# Altium PCB PCB2.PcbDoc
Units mm, origin at the board's own origin, x right, y up, seen from the top; angles counter-clockwise.
Board outline 50 x 43.3 mm, 2 copper layers (Top Layer, Bottom Layer); 45 components, 34 nets, 189 pads, 120 vias.
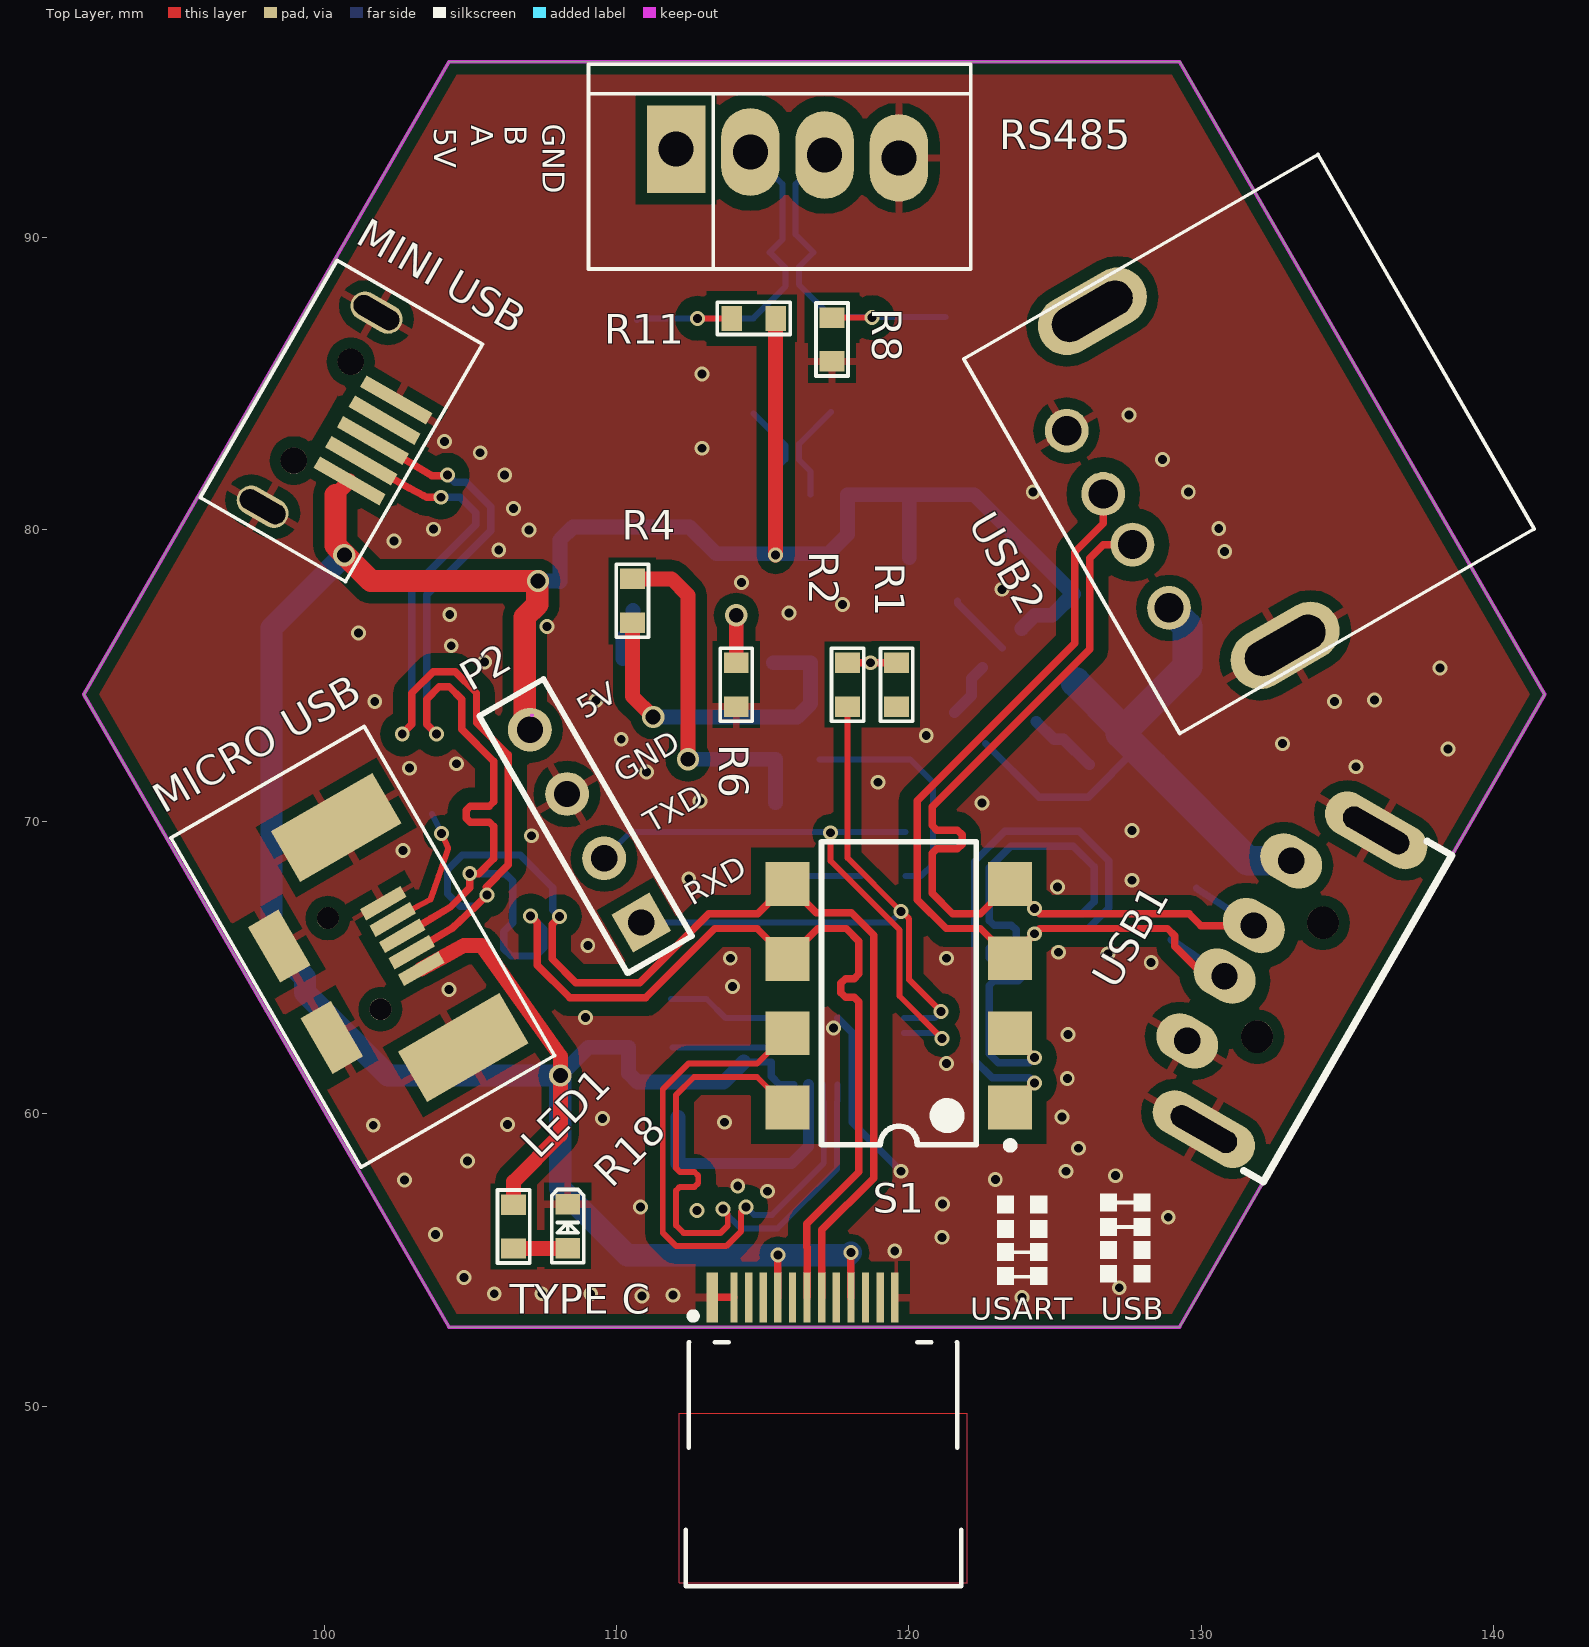
[diagram p0: Top Layer view]
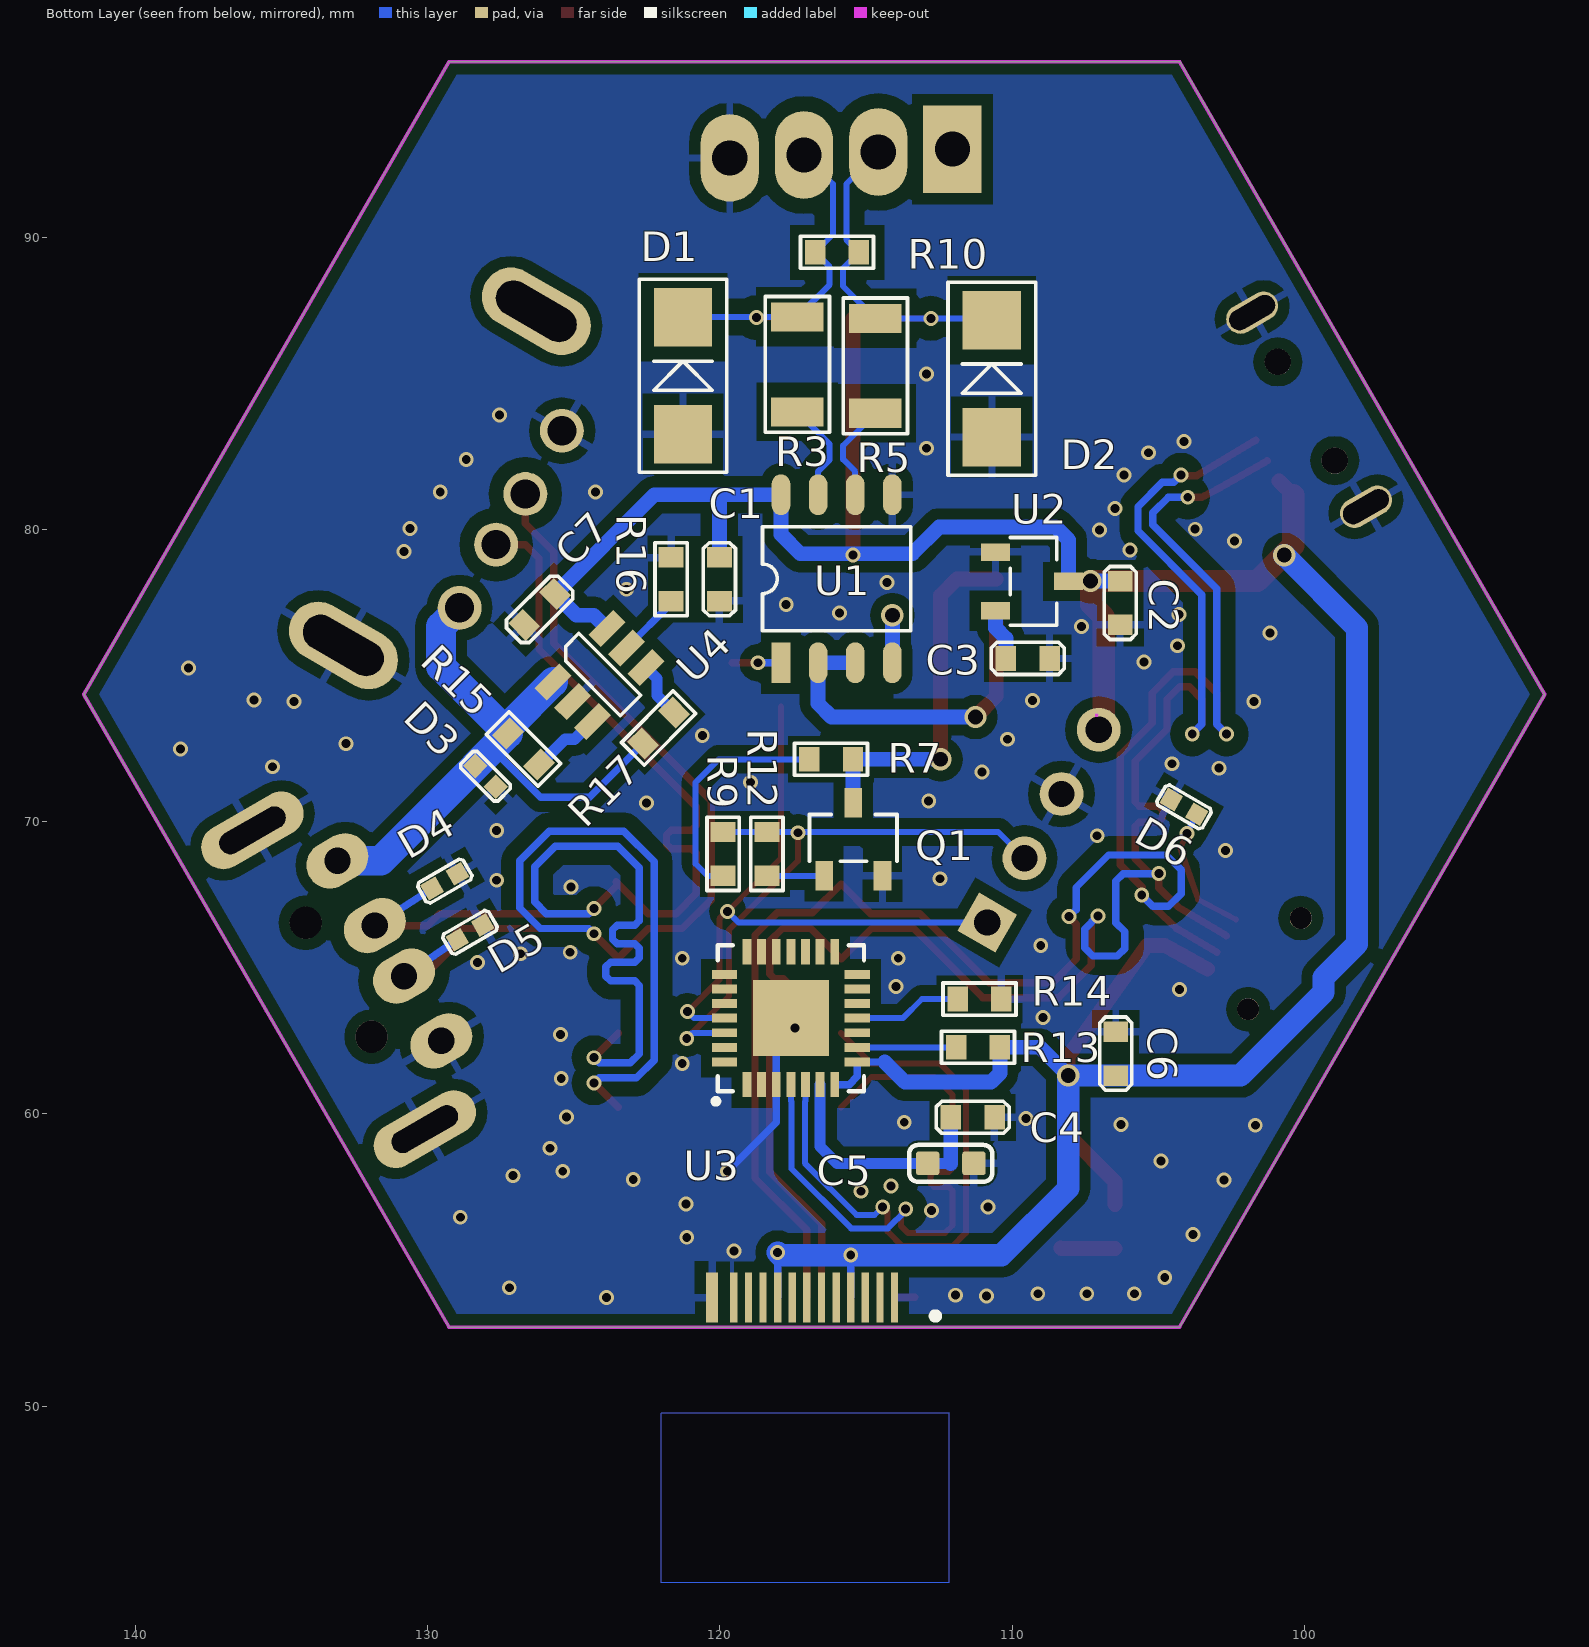
[diagram p1: Bottom Layer view, seen from below]

## Layer stack, top to bottom
Top Layer: signal copper 0.0356
Dielectric: dielectric 0.32, FR-4, Dk 4.8
Bottom Layer: signal copper 0.0356

## Board outline
104.267,52.705 91.767,74.356 104.267,96.006 129.267,96.006 141.767,74.356 129.267,52.705

## Design rules (kind name [scope] priority, off if disabled: settings)
Clearance usb [InNetClass('usb')] p1: gap=0.127
Clearance gnd [InPolygon] p2: gap=0.381
Clearance [All] p3: gap=0.127
DiffPairsRouting [All] p1: maxlimit=0.254 minlimit=0.152 mostfreqgap=0.254 maxuncoupledlength=12.7
PolygonConnect [IsVia] p1: connectstyle=Direct reliefconductorwidth=0.254 reliefentries=4 polygonreliefangle="90 Angle"
PolygonConnect PolygonConnect_1 [All] p2: connectstyle=Relief reliefconductorwidth=0.254 reliefentries=4 polygonreliefangle="90 Angle"
RoutingVias RoutingVias_1 [All] p1: holewidth=0.711 width=1.27 viastyle="Through Hole" minholewidth=0.711 minwidth=1.27 maxholewidth=0.711 maxwidth=1.27
RoutingVias [All] p2: holewidth=0.711 width=1.27 viastyle="Through Hole" minholewidth=0.711 minwidth=1.27 maxholewidth=0.711 maxwidth=1.27
SilkscreenOverComponentPads [All] p1: minsilkscreentomaskgap=0.025
SolderMaskExpansion [All] p1: expansion=0.102
Width [All] p1: maxlimit=5.08 minlimit=0.127 preferedwidth=0.254
26 further rules are at their usual default settings.

## Classes and differential pairs
component class connector: C4 C5 C6 C7 C61 D3 D4 D5 D6 D7 J1 LED1 "MICRO USB" "MINI USB" P2 P3 R13 R14 R15 R16 R17 R18 R19 R42 S1 "TYPE C" U3 U4 U7 USB1 USB2 USB3 USB4
component class 485: C1 C2 C3 D1 D2 D8 P1 Q1 Q19 R1 R2 R3 R4 R5 R6 R7 R8 R9 R10 R11 R12 R41 R43 R58 R83 R139 R218 RS485 U1 U2
net class usb: 485_N 485_P 4852_N 4852_P D2_N D2_P D3_N D3_P D_N D_P
differential pair D3: +D3_P -D3_N
differential pair D2: +D2_P -D2_N
differential pair D: +D_P -D_N
differential pair 4852: +4852_P -4852_N
differential pair 485: +485_P -485_N

## Components (designator, comment, footprint, x,y, rotation, side; value= is the part's Value field where it differs from the comment)
C1 "0.01uF" 0603C 120.015,77.546 r90 bottom
C2 "10uF/25V" 0603C 106.299,76.733 r90 bottom
C3 "10uF/25V" 0603C 108.712,75.59 r0 bottom
C4 "4.7uF/25V" 0603C 110.598,59.884 r0 bottom
C5 "0.1uF/50V" C0603 112.096,58.31 r180 bottom
C6 "10uF" 0603C 106.451,62.814 r270 bottom
C7 "47uF" 0603C 126.695,76.733 r135 bottom
D1 "SMAJ6.5CA" SMA 121.26,83.261 r90 bottom
D2 "SMAJ6.5CA" SMA 110.693,83.16 r90 bottom
D3 "PESDNC2FD5VB" C0402 128.372,71.907 r225 bottom
D4 "PESDNC2FD5VB" C0402 129.845,67.716 r150 bottom
D5 "PESDNC2FD5VB" C0402 128.981,65.964 r150 bottom
D6 "PESDNC2FD5VB" C0402 103.683,70.256 r30 bottom
LED1 "" 0603LED 108.331,55.411 r90 top
"MICRO USB" "Micro-USB" "MICRO USB M" 102.667,66.091 r30 top (schematic designator USB3)
"MINI USB" "USB-MINI-A" MINIUSB-M 100.863,81.661 r330 top (schematic designator USB4)
P2 "Header 4" HDR1X4 110.846,66.548 r120 top
Q1 "MMBT3904" SOT23-3 116.434,68.148 r270 bottom
R1 "100k" 0603R 119.583,75.438 r270 top
R2 "1K" 0603R 117.907,75.438 r270 top
R3 "10" 1206R 117.348,87.274 r270 bottom
R4 "1K" 0603R 110.541,76.81 r90 top
R5 "10" 1206R 114.681,87.224 r270 bottom
R6 "1K" 0603R 114.097,75.438 r270 top
R7 "10K" 0603R 115.443,72.136 r0 bottom
R8 "1k" 0603R 117.373,87.249 r270 top
R9 "10K" 0603R 119.888,68.148 r90 bottom
R10 "100" 0603R 115.24,89.484 r0 bottom
R11 "1k" 0603R 115.443,87.224 r180 top
R12 "4.7K" 0603R 118.389,68.148 r90 bottom
R13 "1K/5%/1/8W" 0603R 110.414,62.281 r0 bottom
R14 "10K/5%/1/8W" 0603R 110.363,63.932 r0 bottom
R15 "10K/5%/1/8W" 0603R 126.187,71.958 r45 bottom
R16 "20K/1%/1/8W" 0603R 121.666,77.546 r90 bottom
R17 "10K/5%/1/8W" 0603R 121.564,73.736 r315 bottom
R18 "330" 0603R 106.477,56.896 r270 top
RS485 "Header 4" 4X2.54MMZ 112.039,93.015 r0 top (schematic designator P1)
S1 "SW DIP-4" SW_SMT_8 119.659,61.493 r180 top
"TYPE C" "TYPE C" Type_C-M 114.021,53.721 r0 top (schematic designator J1)
U1 "THVD1500" so-8 117.907,75.438 r90 bottom
U2 "XC6206P302MR" SOT23-3 110.566,79.223 r0 bottom
U3 "CP2102" QFN28N5X5-0p5P-L 117.568,63.277 r90 bottom
U4 "JW7115-2" SOT23-6 125.705,74.778 r225 bottom
USB1 "USB-A-M" USB_A/P_A 133.045,64.592 r60 top
USB2 "USB-A-F" USB-A 128.905,77.318 r120 top

## Footprints (in the part's own frame and the unit in brackets; to place one, negate y for a bottom-side part, rotate by r counter-clockwise, add the part's x,y. Pads: shape width x height; smd on the part's side, far side on the other; paste and mask are expansions set on the pad)
4X2.54MMZ [mm]
  rect 2x3 hole 1.2: 1(0,0)
  oval 2x3 hole 1.2: 2(2.54,-0.1) 3(5.08,-0.2) 4(7.62,-0.3)
  silkscreen extent -3,-4.1 10.08,2.9
0603C [mm]
  rect 0.7x0.85 smd: 1(0,0) 2(1.5,0)
  silkscreen extent -0.5,-0.55 2,0.55
0603LED [mm]
  rect 0.7x0.85 smd: 1(0,0) 2(1.5,0)
  silkscreen extent -0.5,-0.55 2,0.55
0603R [mm]
  rect 0.7x0.85 smd: 1(0,0) 2(1.5,0)
  silkscreen extent -0.5,-0.55 2,0.55
1206R [mm]
  rect 1x1.8 smd: 1(0,0) 2(3.25,0)
  silkscreen extent -0.7,-1.1 3.95,1.1
C0402 [mm]
  rect 0.6x0.6 smd: 1(0,0) 2(1,0)
  silkscreen extent -0.4,-0.4 1.4,0.4
C0603 [mm]
  rrect20% 0.8x0.8 smd: 1(-0.792,0) 2(0.792,0)
  silkscreen extent -1.42,-0.63 1.42,0.63, body extent -0.8,-0.4 0.8,0.4, height 0.3
HDR1X4 [mm] "Connector; Header; 4 Position"
  rect 1.5x1.5 hole 0.9: 1(0,0)
  round 1.5 hole 0.9: 2(2.54,0) 3(5.08,0) 4(7.62,0)
  silkscreen extent -1.27,-1.27 8.89,1.27
"MICRO USB M" [mm]
  rect 1.6x0.45 smd: 1(0,-1.3) 2(0,-0.65) 3(0,0) 4(0,0.65) 5(0,1.3)
  rect 1.2x2.2 smd: 6(-3.82,1.8) 7(-3.82,-1.8)
  rect 4x2 smd: 8(-0.1,4.35) 9(-0.1,-4.35)
  round 0.75 hole 0.75 unplated: 11(-1.9,-1.8) 12(-1.9,1.8)
  silkscreen extent -5.18,-6.15 2.46,6.86
MINIUSB-M [mm]
  rect 2.6x0.45 smd: 1(0,0) 2(0,0.8) 3(0,1.6) 4(0,2.4) 5(0,3.2)
  oval 1.9x1 hole 0.7 slot 1.7 at 0 deg: 6(-2.134,-2.25) 7(-2.083,5.45)
  round 0.9 hole 0.9 unplated: 8(-2,3.55) 9(-2,-0.35)
  silkscreen extent -4.14,-3.05 1.6,6.32
QFN28N5X5-0p5P-L [mil]
  rect 34x12 smd mask+5: 1(-89.5,59.05) 2(-89.5,39.37) 3(-89.5,19.69) 4(-89.5,0) 5(-89.5,-19.68) 6(-89.5,-39.37) 7(-89.5,-59.05) 15(89.5,-59.05) 16(89.5,-39.37) 17(89.5,-19.68) 18(89.5,0) 19(89.5,19.68) 20(89.5,39.37) 21(89.5,59.05)
  rect 12x34 smd mask+5: 8(-59.05,-89.5) 9(-39.37,-89.5) 10(-19.68,-89.5) 11(0,-89.5) 12(19.68,-89.5) 13(39.37,-89.5) 14(59.05,-89.5) 22(59.05,89.5) 23(39.37,89.5) 24(19.68,89.5) 25(0,89.5) 26(-19.68,89.5) 27(-39.37,89.5) 28(-59.05,89.5)
  rect 102.36x102.36 smd mask+5: 29(0,0)
  silkscreen extent -114,-99 99,103
SMA [mm]
  rect 2x2 smd: 1(0,0) 2(4,0)
  silkscreen extent -1.3,-1.5 5.3,1.5
so-8 [mil]
  rect 55x25 smd: 1(0,0)
  oval 55x25 smd: 2(0,-50) 3(0,-100) 4(0,-150) 5(226.38,-150) 6(226.38,-100) 7(226.38,-50) 8(226.38,0)
  silkscreen extent 43,-175 183,25
SOT23-3 [mm]
  rect 1x0.6 smd: 1(0,0) 2(0,2) 3(-2.5,1)
  silkscreen extent -2.1,-0.5 -0.5,2.5
SOT23-6 [mm]
  rect 0.6x1.2 smd: 1(0,0) 2(0.95,0) 3(1.9,0) 4(1.9,2.6) 5(0.95,2.6) 6(0,2.6)
  silkscreen extent -0.56,0.81 2.44,1.8
SW_SMT_8 [mm] "DIP; 4 Leads; Row Spacing 7.62 mm; Pitch 2.54 mm"
  rect 1.5x1.5 smd: 1(-3.81,1.27) 2(-3.81,-1.27) 3(-3.81,-3.835) 4(-3.81,-6.375) 5(3.81,-6.375) 6(3.81,-3.81) 7(3.81,-1.27) 8(3.81,1.27)
  silkscreen extent -3.94,-7.82 2.65,2.69
Type_C-M [mm]
  rect 0.25x1.7 smd paste+0 mask+0: A1(0,0) A2(0.5,0) A3(1,0) A4(1.5,0) A5(2,0) A6(2.5,0) A7(3,0) A8(3.5,0) A9(4,0) A10(4.5,0) A11(5,0) A12(5.5,0)
  rect 0.4x1.7 smd paste+0 mask+0: A13(-0.75,0)
  rect 0.25x1.7 smd far side paste+0 mask+0: B1(5.5,0) B2(5,0) B3(4.5,0) B4(4,0) B5(3.5,0) B6(3,0) B7(2.5,0) B8(2,0) B9(1.5,0) B10(1,0) B11(0.5,0) B12(0,0)
  rect 0.4x1.7 smd far side paste+0 mask+0: B13(6.25,0)
  Multi-Layer lines w0.025: -1.88,-9.757 7.976,-9.757 7.976,-3.966 -1.88,-3.966 -1.88,-9.757
  silkscreen extent -1.65,-9.88 7.77,-0.53
USB-A [mm]
  round 1.5 hole 1: 1(0,0) 2(2.5,0) 3(4.5,0) 4(7,0)
  oval 2x4 hole 1.2 slot 3 at 90 deg: 5(-3.1,-2.8) 6(10.1,-2.8)
  silkscreen extent -3.91,-12.17 10.89,1.83
USB_A/P_A [mm] "A型USB 插头，20*"
  round 1.1 hole 1.1 unplated: 0(-2.25,0) 0(2.25,0)
  oval 1.6x2.2 hole 0.9: 1(3.543,2) 2(0.987,2) 3(-1.013,2) 4(-3.569,2)
  oval 1.524x3.81 hole 0.762 slot 2.5 at 90 deg: 5(-5.9,0) 5(5.9,0)
  silkscreen extent -6.45,-2.67 6.45,-1.7, body extent -14.3,-23.1 14.54,6.61, height 3.25

## Part data
C1 C2 C3: library part C, "C"
C4 C5: library part Cap, "Capacitor"
C6 C7: library part CAP, "Capacitor"
D1 D2: library part "DIODE S", "Schottky Diode"
D3 D4 D5 D6: library part 1_1.5KE100A_Dup1
LED1: library part LED
"MICRO USB" "MINI USB": library part USB
P2 RS485: "Header, 4-Pin"
Q1: library part NPN
R1 R3 R5 R8 R11: library part RES2
R2 R4 R6 R10 R18: library part R, "R"
R7 R9 R12: library part RES1
R13 R14 R15 R16 R17: library part Res2, "Resistor"
S1: "DIP Switch, 4 Position, SPST"
U1: library part SN65HVD06D
U3: "Imported"
USB1 USB2: library part "Header 5", "Header, 5-Pin"

## Via types
v1: diameter 0.508, hole 0.305, Top Layer to Bottom Layer, tented both sides, 114 vias
v2: diameter 0.762, hole 0.508, Top Layer to Bottom Layer, tented both sides, 6 vias

## Nets (pads, with @x,y where several pads share a name; then routed paths per layer and width w, separated by ;. In a path a pad name is that pad's centre, name@x,y a point inside that pad or via, vN(x,y) a via of type N, cw(c..) or ccw(c..) an arc to the next point about the centre after c; other vN are vias at no path point)
485_3.3V1: R1.2
485_EN1: Q1.3 R4.2 R7.1 | length 12.2
  Top Layer w0.508: R4.2 111.886,78.31 112.446,77.749 v2(112.446,72.136)
  Bottom Layer w0.508: v2(112.446,72.136) R7.1 115.443,70.658 Q1.3
485_N: D1.2 R3.1 R8.1 R10.2 RS485.3 | length 12.2
  Top Layer w0.203: R8.1 v1(118.745,87.249)
  Bottom Layer w0.203: RS485.3 116.129,91.824 116.129,90.095 R10.2 116.243,88.987 116.243,88.379 R3.1 121.246,87.274 D1.2
485_P: D2.2 R5.1 R10.1 R11.2 RS485.2 | length 12.2
  Top Layer w0.203: v1(112.776,87.224) R11.2 R11.2@113.918,87.249
  Bottom Layer w0.203: D2.2 110.757,87.224 R5.1 115.786,88.328 115.786,88.938 R10.1 115.672,89.916 115.672,91.823 RS485.2
4852_N: R5.2 U1.6 | length 3.4
  Bottom Layer w0.203: R5.2 115.786,82.869 115.786,82.398 115.773,82.398 115.367,81.991 U1.6
4852_P: R3.2 U1.7 | length 3.5
  Bottom Layer w0.203: U1.7 116.637,81.991 116.243,82.385 116.243,82.398 116.243,82.919 R3.2
+5V: D3.1 R15.2 R17.2 U4.1 USB1.1 USB2.1 | length 23.7
  Bottom Layer w0.254: R17.2 124.46,70.841 126.137,70.841 127.788,72.491
  Bottom Layer w1.016: U4.1 127.248,73.234 R15.2 ; D3.1 127.788,72.491 127.26,73.019 R15.2 ; USB2.1 129.54,76.683 129.54,75.311 R15.2 ; USB1.1 131.606,68.66 128.365,71.901 127.782,72.485 R15.2
AGND: "MICRO USB.5" "MICRO USB.6" "MICRO USB.7" "MICRO USB.8" "MICRO USB.9" "MINI USB.5" "MINI USB.6" "MINI USB.7" "TYPE C.A1" "TYPE C.A12" "TYPE C.A13" "TYPE C.B1" "TYPE C.B12" "TYPE C.B13" C1.1 C2.1 C3.1 C4.1 C5.2 C6.1 C7.1 D1.1 D2.1 D3.2 D4.2 D5.2 D6.2 LED1.2 P2.3 Q1.2 R6.2 R8.2 R14.1 R16.2 RS485.4 U1.5 U2.1 U3.3 U3.29 U4.2 USB1.4 USB1.5 USB2.4 USB2.5 | length 6.8
  Top Layer w0.254: 113.335,53.721 114.021,53.721
  Bottom Layer w0.254: U3.29 118.068,62.777 118.068,61.443 U3.3 118.068,59.706 v1(119.736,58.039)
  other v1: 123.876,53.721 110.871,53.772 111.938,53.797 105.816,53.848 107.442,53.848 109.118,53.848 127.203,54.051 104.775,54.407 119.521,55.309 121.133,55.778 103.81,55.88 128.88,56.464 112.751,56.693 110.82,56.82 121.158,56.921 115.164,57.353 114.148,57.531 102.743,57.734 122.961,57.76 127.076,57.887 125.374,58.039 104.902,58.395 125.806,58.826 101.676,59.614 106.274,59.639 113.69,59.715 109.525,59.842 125.247,59.893 125.425,61.214 121.285,61.722 125.451,62.713 117.424,62.941 108.941,63.297 104.267,64.262 113.97,64.364 128.295,65.176 113.894,65.329 121.285,65.329 126.822,65.481 125.12,65.532 109.017,65.761 125.095,67.767 127.635,67.996 112.471,68.047 102.692,69.012 107.086,69.52 127.635,69.698 122.504,70.637 112.852,70.714 118.948,71.349 111.023,71.704 102.921,71.831 135.306,71.882 104.521,71.984 138.455,72.492 132.791,72.669 110.16,72.822 120.599,72.949 101.727,74.117 134.569,74.117 109.296,74.143 135.941,74.168 138.176,75.26 105.486,75.463 104.343,76.022 101.168,76.454 107.62,76.683 104.292,77.089 115.9,77.14 117.729,77.428 123.19,77.953 114.275,78.181 130.81,79.248 105.969,79.299 102.387,79.604 107.01,79.985 103.734,80.01 130.607,80.035 106.477,80.721 124.257,81.28 129.565,81.28 106.172,81.864 128.676,82.398 105.334,82.626 112.928,82.779 104.115,83.007 127.533,83.922 112.928,85.319
CP_RXD: P2.1 R2.2 U3.25 | length 22.2
  Top Layer w0.203: R2.2 117.907,68.758 v1(119.736,66.929) ; v1@119.736,66.954 120.015,66.675 120.015,64.592 v1(121.107,63.5)
  Bottom Layer w0.203: P2.1 119.355,66.548 v1(119.736,66.929) ; U3.25 120.884,63.277 v1(121.107,63.5)
CP_TXD: P2.2 R9.2 R12.2 U3.26 | length 20.7
  Top Layer w0.203: v1(117.323,69.621) 117.323,68.66 119.685,66.297 119.685,64.033 v1(121.133,62.586)
  Bottom Layer w0.203: P2.2 110.476,69.648 R12.2 R9.2 ; U3.26 120.941,62.777 v1(121.133,62.586)
D2_N: S1.8 U3.4 | length 20.7
  Top Layer w0.203: v1(113.64,56.744) 113.805,56.578 113.805,56.261 113.805,56.172 113.563,55.931 112.293,55.931 112.039,56.185 112.039,57.379 112.166,57.506 112.669,57.506 112.796,57.633 112.796,57.887 112.669,58.014 112.166,58.014 112.039,58.141 112.039,59.944 112.039,60.655 112.649,61.265 114.808,61.265 S1.8
  Bottom Layer w0.203: v1(113.64,56.744) 113.64,56.693 114.249,56.083 115.505,56.083 117.547,58.125 117.547,60.431 117.568,60.452 U3.4
D2_P: S1.7 U3.5 | length 20.8
  Top Layer w0.203: 111.582,60.198 111.582,59.893 ; 111.665,60.928 111.874,61.136 ; v1(114.427,56.82) 114.262,56.655 114.262,55.983 113.753,55.474 112.039,55.474 111.582,55.931 111.582,59.893 ; S1.7 114.808,61.722 112.46,61.722 111.874,61.136 ; 111.582,59.893 111.582,60.845 111.874,61.136
  Bottom Layer w0.203: v1(114.427,56.82) 114.706,56.54 115.316,56.54 117.09,58.314 117.09,60.431 117.068,60.452 U3.5
D3_N: D4.1 S1.2 S1.4 USB1.2 USB2.2 | length 52.1
  Top Layer w0.254: S1.2 v1(124.308,61.925) ; S1.4@123.546,67.945 S1.4 ; USB2.2 126.65,79.483 126.187,79.019 126.187,75.895 120.802,70.51 120.802,69.869 120.961,69.71 121.667,69.71 121.825,69.552 121.825,69.234 121.667,69.075 120.961,69.075 120.802,68.917 120.802,67.546 121.495,66.853 122.453,66.853 S1.4 ; USB1.2 129.997,66.447 129.591,66.853 124.485,66.853 v1(124.308,67.031) S1.4
  Bottom Layer w0.254: v1(124.308,61.925) 124.13,61.747 123.063,61.747 122.758,62.052 122.758,64.395 122.917,64.554 123.741,64.554 123.9,64.713 123.9,65.03 123.741,65.189 122.917,65.189 122.758,65.348 122.758,65.665 122.917,65.824 123.513,65.824 123.672,65.983 123.672,66.3 123.513,66.459 122.917,66.459 122.758,66.618 122.758,68.428 123.495,69.164 125.628,69.164 126.34,68.453 126.34,67.259 125.933,66.853 124.485,66.853 v1(124.308,67.031) ; D4.1 USB1.2
D3_P: D5.1 S1.1 S1.3 USB1.3 USB2.3 | length 51.9
  Top Layer w0.254: S1.1 v1(124.308,61.062) ; USB2.3 126.655,80.206 125.679,79.23 125.679,76.106 120.294,70.721 120.294,67.335 121.285,66.345 122.453,66.345 S1.3 v1(124.308,66.167) 124.485,66.345 128.854,66.345 129.108,66.091 129.108,65.735 130.129,64.715 USB1.3 USB1.3@130.807,64.875
  Bottom Layer w0.254: v1(124.308,61.062) 124.13,61.239 122.853,61.239 122.25,61.842 122.25,68.638 123.284,69.672 125.839,69.672 126.848,68.663 126.848,67.049 126.144,66.345 124.485,66.345 v1(124.308,66.167) ; D5.1 USB1.3
D_N: "MICRO USB.2" "MINI USB.2" "TYPE C.A7" S1.5 | length 64.3
  Top Layer w0.254: 101.263,82.354 102.921,81.407 103.403,81.153 ; v1(102.667,73) 102.997,73.33 102.997,74.404 103.726,75.133 104.477,75.133 105.207,74.404 105.207,73.376 106.299,72.284 106.299,68.522 105.541,67.764 105.562,67.742 v1(105.562,67.488) 105.093,67.018 104.376,66.358 102.992,65.528 ; 103.505,81.102 v1(103.988,81.102) ; v1(108.052,66.751) 107.798,66.497 107.798,65.303 108.61,64.491 110.788,64.491 113.15,66.853 114.833,66.853 S1.5 116.84,66.878 118.041,66.878 118.796,66.123 118.796,57.803 117.029,56.036 117.029,55.648 117.029,55.437 ; 117.021,53.721 117.021,55.445
  Bottom Layer w0.254: v1(102.667,73) 102.997,73.33 102.997,77.978 105.181,80.162 105.181,80.569 104.648,81.102 v1(103.988,81.102) ; v1(105.562,67.488) 105.181,67.107 104.648,67.107 104.216,67.539 104.216,68.36 104.715,68.859 106.7,68.859 107.81,67.749 107.81,66.992 v1(108.052,66.751)
D_P: "MICRO USB.3" "MINI USB.3" "TYPE C.A6" S1.6 | length 64.3
  Top Layer w0.254: 101.663,83.047 103.683,81.839 104.191,81.839 v1(104.216,81.864) ; 102.667,66.091 103.643,66.677 104.318,67.081 104.978,67.742 v1(104.978,68.224) 105.283,68.224 105.791,68.732 105.791,69.469 105.791,69.837 105.651,69.977 104.992,69.977 104.853,70.117 104.853,70.396 104.992,70.536 105.651,70.536 105.791,70.675 105.791,71.095 105.791,71.374 105.791,72.074 104.699,73.166 104.699,74.193 104.267,74.625 103.937,74.625 103.505,74.193 103.505,73.33 v1(103.835,73) ; v1(107.061,66.777) 107.29,66.548 107.29,65.093 108.4,63.983 110.998,63.983 113.36,66.345 114.808,66.345 S1.6 116.891,66.345 117.856,66.345 118.288,65.913 118.288,65.583 118.288,65.265 118.288,64.789 118.129,64.63 117.834,64.63 117.676,64.472 117.676,64.154 117.834,63.995 118.129,63.995 118.288,63.837 118.288,63.5 118.288,58.014 116.513,56.238 116.513,55.445 116.513,55.437 ; 116.521,53.721 116.521,55.437
  Bottom Layer w0.254: v1(103.835,73) 103.505,73.33 103.505,77.768 105.689,79.952 105.689,80.779 104.858,81.61 104.47,81.61 v1(104.216,81.864) ; v1(104.978,68.224) 106.197,68.224 106.451,67.97 106.451,66.548 106.147,66.243 106.147,65.659 106.401,65.405 107.239,65.405 107.518,65.684 107.518,66.319 v1(107.061,66.777)
DTR: U3.28
NetC4_2: C4.2 C5.1 U3.6 | length 8.4
  Bottom Layer w0.381: 112.096,58.31 115.993,58.31 116.568,58.885 116.568,60.35 U3.6
  Bottom Layer w0.508: 112.096,58.31 112.098,58.311 C4.2
NetD6_1: "MICRO USB.4" D6.1 | length 4.6
  Top Layer w0.203: 102.342,66.654 103.632,67.335 103.911,68.138 104.242,69.088 v1(104.013,69.596)
  Bottom Layer w0.203: D6.1 v1(104.013,69.596)
NetLED1_1: LED1.1 R18.2 | length 1.9
  Top Layer w0.508: R18.2 108.316,55.396 LED1.1
NetQ1_1: Q1.1 R12.1 | length 2
  Bottom Layer w0.203: Q1.1 R12.1
NetR1_1: R1.1 R2.1 U1.1 | length 2.5
  Top Layer w0.254: R2.1 v1(118.694,75.438) R1.1
  Bottom Layer w0.254: U1.1 v1(118.694,75.438)
NetR4_1: R4.1 U1.2 U1.3 | length 11.8
  Top Layer w0.508: R4.1 110.541,74.295 v2(111.252,73.584)
  Bottom Layer w0.508: v2(111.252,73.584) 116.18,73.584 116.637,74.041 U1.2 U1.3
NetR6_1: R6.1 U1.4 | length 3.3
  Top Layer w0.508: R6.1 v2(114.097,77.064)
  Bottom Layer w0.508: U1.4 v2(114.097,77.064)
NetR13_2: R13.2 U3.9 | length 3.4
  Bottom Layer w0.203: R13.2 111.918,62.277 U3.9
NetR14_2: R14.2 U3.11 | length 3.7
  Bottom Layer w0.203: R14.2 113.081,63.932 113.736,63.277 U3.11
NetR15_1: R15.1 U4.3 | length 2.4
  Bottom Layer w0.381: U4.3 124.973,72.822 125.298,72.822 126.162,71.958 R15.1
NetR16_1: R16.1 U4.5 | length 2.2
  Bottom Layer w0.254: R16.1 121.666,77.473 U4.5
NetR17_1: R17.1 U4.4 | length 1.9
  Bottom Layer w0.381: R17.1 122.149,74.32 122.149,74.899 U4.4
RTS: U3.24
VCC: RS485.1
VCC-5V: "MICRO USB.1" "MINI USB.1" "TYPE C.A4" "TYPE C.A9" "TYPE C.B4" "TYPE C.B9" C1.2 C2.2 C6.2 C7.2 P2.4 R11.1 R13.1 R18.1 U1.8 U2.3 U3.7 U3.8 U4.6 | length 122.2
  Top Layer w0.254: 115.521,53.721 v1(115.521,55.167) ; 118.021,53.721 v1(118.021,55.257)
  Top Layer w0.508: 100.381,81.178 100.863,81.661 ; 103.317,64.965 104.169,65.43 104.775,65.761 105.385,65.761 108.077,61.976 v2(108.077,61.316) 108.077,59.284 106.477,57.683 R18.1 ; v1(115.443,79.121) R11.1
  Top Layer w0.762: 100.381,81.178 100.381,79.451 101.599,78.233 v2(107.315,78.233) ; P2.4 106.858,73.325 106.858,76.998 107.29,77.43 v2@107.29,78.232
  Bottom Layer w0.254: 114.355,61.777 U3.8 115.295,61.286 115.577,61.004 U3.7 ; 115.521,53.721 v1(115.521,55.167) ; 118.021,53.721 v1(118.021,55.257)
  Bottom Layer w0.508: C2.2 108.055,78.233 U2.3 108.066,79.644 108.509,80.086 112.497,80.086 113.411,79.172 117.246,79.172 117.907,79.832 U1.8 120.167,81.188 ; v2(108.077,61.316) 109.042,62.281 R13.1 110.414,61.392 110.719,61.087 113.665,61.087 114.355,61.777 ; C1.2 120.015,81.036 120.167,81.188 ; U4.6 124.314,77.064 124.904,77.064 C7.2 122.241,81.188 120.167,81.188
  Bottom Layer w0.762: v2(100.686,79.121) 98.196,76.632 98.196,65.811 99.339,64.668 99.339,64.16 102.184,61.316 v2(108.077,61.316) 108.077,57.455 110.364,55.167 v1(115.521,55.167) 117.931,55.167 v1(118.021,55.257)
VCC_3.3V: C3.2 U2.2 | length 1.8
  Bottom Layer w0.508: C3.2 110.212,76.278 110.566,76.632 U2.2
VCC_3.3V_S: R7.2 R9.1 | length 8.1
  Bottom Layer w0.203: R7.2 120.04,72.136 120.828,71.349 120.828,68.555 120.421,68.148 R9.1
pads on no net: "MICRO USB.11" "MICRO USB.12" "MINI USB.4" "MINI USB.8" "MINI USB.9" "TYPE C.A2" "TYPE C.A3" "TYPE C.A5" "TYPE C.A8" "TYPE C.A10" "TYPE C.A11" "TYPE C.B2" "TYPE C.B3" "TYPE C.B5" "TYPE C.B6" "TYPE C.B7" "TYPE C.B8" "TYPE C.B10" "TYPE C.B11" U3.1 U3.2 U3.10 U3.12 U3.13 U3.14 U3.15 U3.16 U3.17 U3.18 U3.19 U3.20 U3.21 U3.22 U3.23 U3.27 USB1.0 USB2.6

## Polygon pours and split planes (outlines as drawn)
AGND on Top Layer "Mid-Layer 1-No Net" (solid, remove dead copper, pour order 1000): 92.735,103.048 98.984,96.799 151.054,96.799 151.054,61.976 139.624,50.546 137.185,48.108 100.406,48.108 100.406,51.537 82.169,69.774 93.929,81.534 93.929,102.616
AGND on Bottom Layer "Mid-Layer 1-No Net" (solid, remove dead copper, pour order 1001): 85.725,100.584 88.29,98.019 156.413,98.019 156.413,52.705 152.578,48.87 149.708,45.999 111.785,45.999 101.168,45.999 89.764,57.404 85.141,62.027 85.141,91.719 85.141,96.063 87.503,98.425

## Keep-outs
Keep-Out Layer:
  circle w0.064: c116.767,96.006 r0.032
  circle w0.064: c135.517,85.181 r0.032
  circle w0.064: c135.517,63.53 r0.032
  circle w0.064: c116.767,52.705 r0.032
  circle w0.064: c98.017,63.53 r0.032
  circle w0.064: c98.017,85.181 r0.032
  circle w0.064: c141.767,74.356 r0.032
  circle w0.064: c129.267,52.705 r0.032
  circle w0.064: c104.267,52.705 r0.032
  circle w0.064: c91.767,74.356 r0.032
  circle w0.064: c104.267,96.006 r0.032
  circle w0.064: c107.105,73.64 r0.032
  lines w0.127: 91.767,74.356 104.267,96.006 129.267,96.006 141.767,74.356 129.267,52.705 104.267,52.705 91.767,74.356

## Silkscreen, mask and mechanical layers (free items; w line width, h text height)
Top Overlay:
  rectangle: 126.543,56.667 127.127,57.277
  rectangle: 126.543,55.829 127.127,56.439
  rectangle: 126.543,55.042 127.127,55.651
  rectangle: 126.543,54.229 127.127,54.839
  rectangle: 127.686,54.229 128.27,54.839
  rectangle: 127.686,55.042 128.27,55.651
  rectangle: 127.686,55.829 128.27,56.439
  rectangle: 127.686,56.667 128.27,57.277
  rectangle: 124.155,56.591 124.739,57.201
  rectangle: 124.155,55.753 124.739,56.363
  rectangle: 124.155,54.966 124.739,55.575
  rectangle: 124.155,54.153 124.739,54.762
  rectangle: 123.012,54.153 123.596,54.762
  rectangle: 123.012,54.966 123.596,55.575
  rectangle: 123.012,55.753 123.596,56.363
  rectangle: 123.012,56.591 123.596,57.201
  lines w0.127: 123.444,54.432 124.206,54.432 ; 123.495,55.27 124.257,55.27 ; 127.051,56.134 127.813,56.134 ; 127.051,56.972 127.813,56.972
  text "GND" at 107.467,93.878 h0.76 r270
  text "A" at 105.029,93.828 h0.76 r270
  text "B" at 106.172,93.828 h0.76 r270
  text "5V" at 103.759,93.751 h0.76 r270
  text "5V" at 108.915,73.482 h0.76 r30
  text "GND" at 110.185,71.323 h0.76 r30
  text "TXD" at 111.201,69.596 h0.76 r30
  text "RXD" at 112.598,67.107 h0.76 r30
  text "USART" at 122.098,52.959 h0.76
  text "USB" at 126.568,52.959 h0.76
Mechanical 1:
  circle w0.064: c116.767,96.006 r0.032
  circle w0.064: c135.517,85.181 r0.032
  circle w0.064: c135.517,63.53 r0.032
  circle w0.064: c116.767,52.705 r0.032
  circle w0.064: c98.017,63.53 r0.032
  circle w0.064: c98.017,85.181 r0.032
  circle w0.064: c141.767,74.356 r0.032
  circle w0.064: c129.267,52.705 r0.032
  circle w0.064: c104.267,52.705 r0.032
  circle w0.064: c91.767,74.356 r0.032
  circle w0.064: c104.267,96.006 r0.032
  circle w0.064: c107.105,73.64 r0.032
  lines w0.127: 91.767,74.356 104.267,52.705 129.267,52.705 141.767,74.356 129.267,96.006 104.267,96.006 91.767,74.356